# Altium PCB PowerSwitchBoard.PcbDoc
Units mm, origin at the board's own origin, x right, y up, seen from the top; angles counter-clockwise.
Board outline 79 x 95 mm, 2 copper layers (Top Layer, Bottom Layer); 59 components, 30 nets, 151 pads, 30 vias.
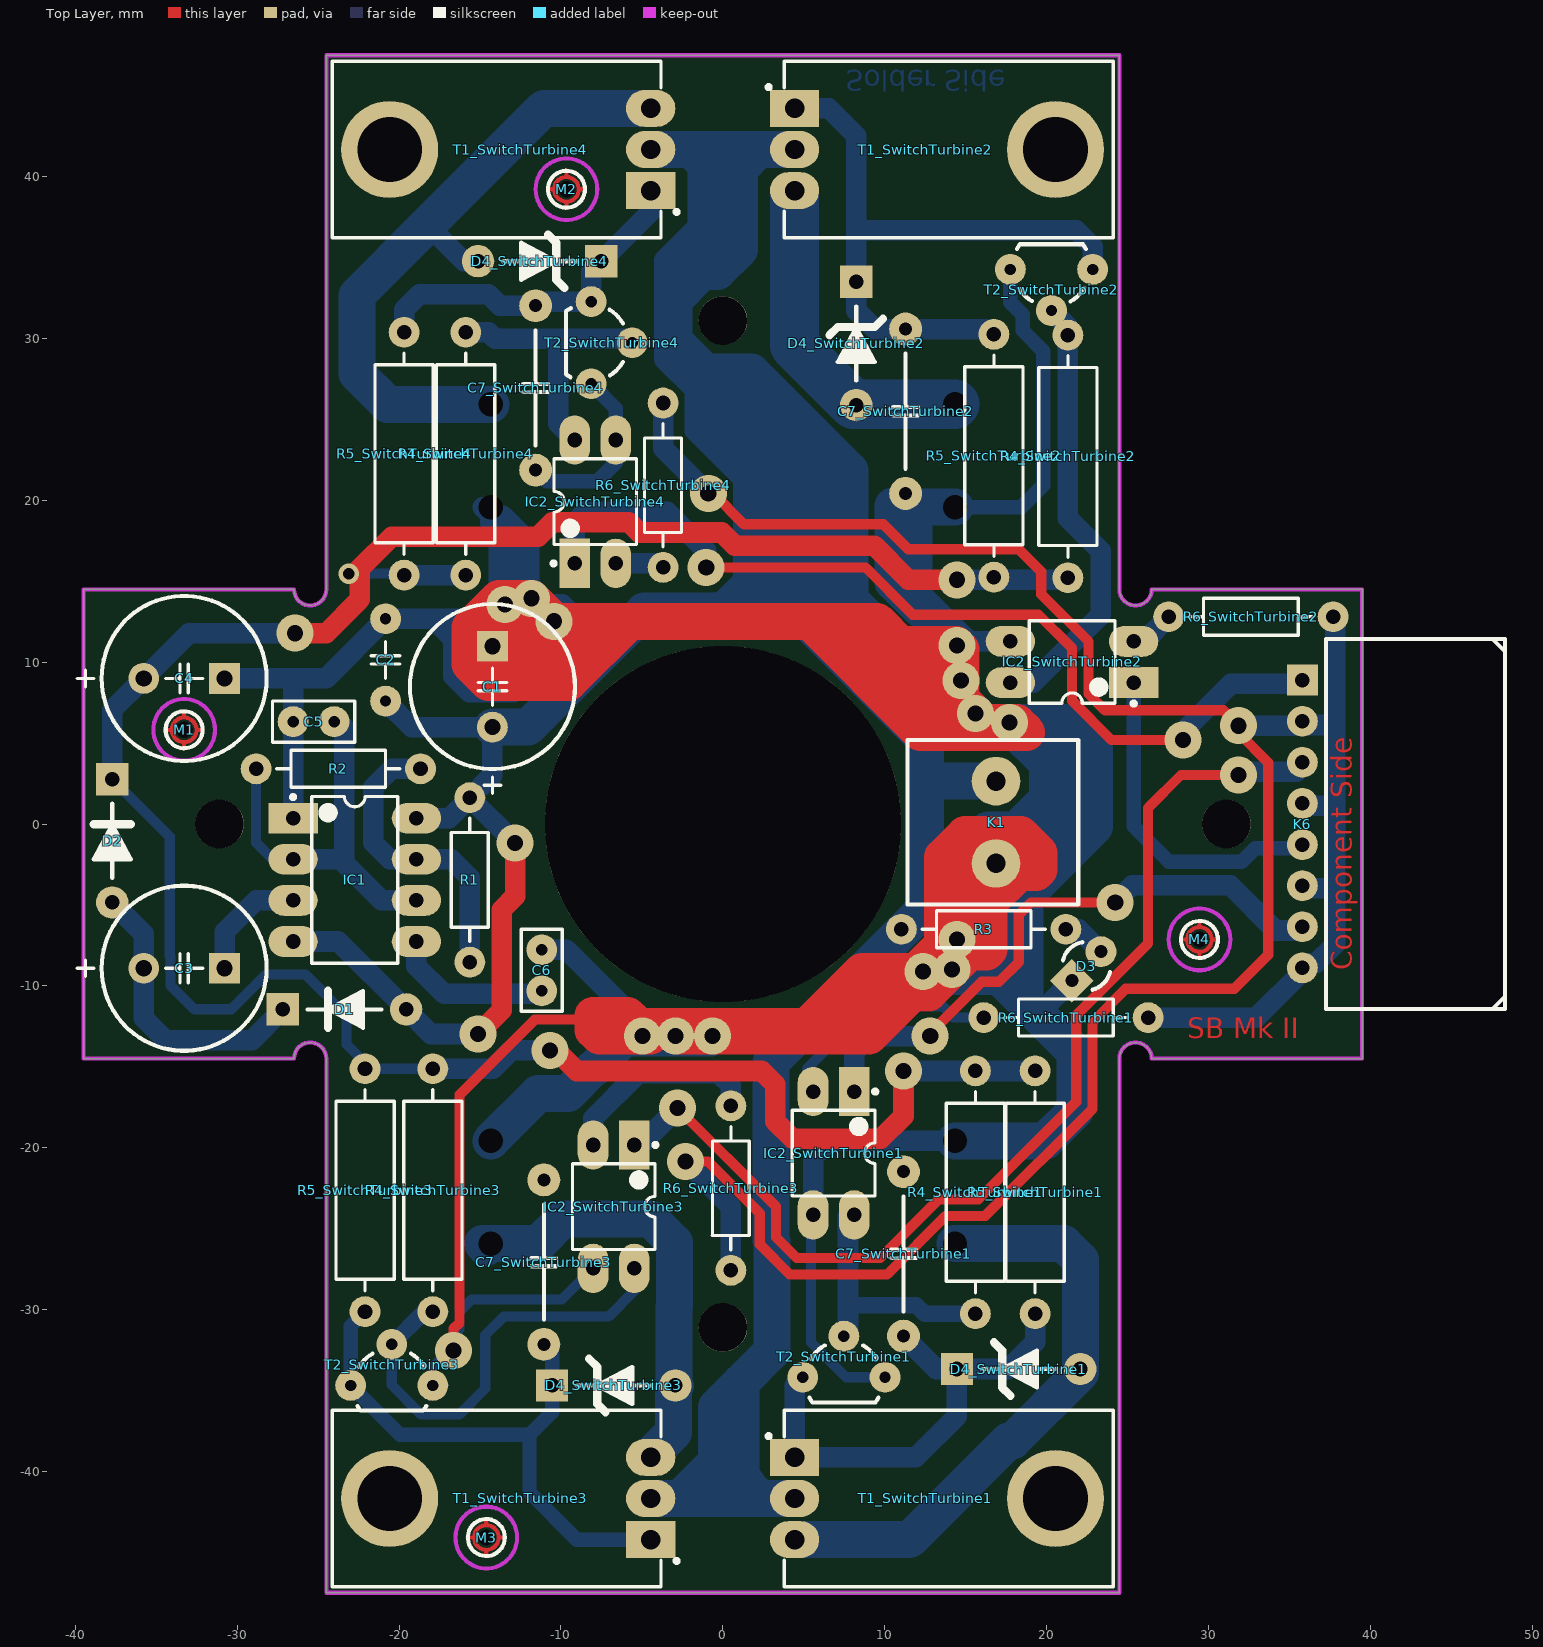
[diagram p0: Top Layer view]
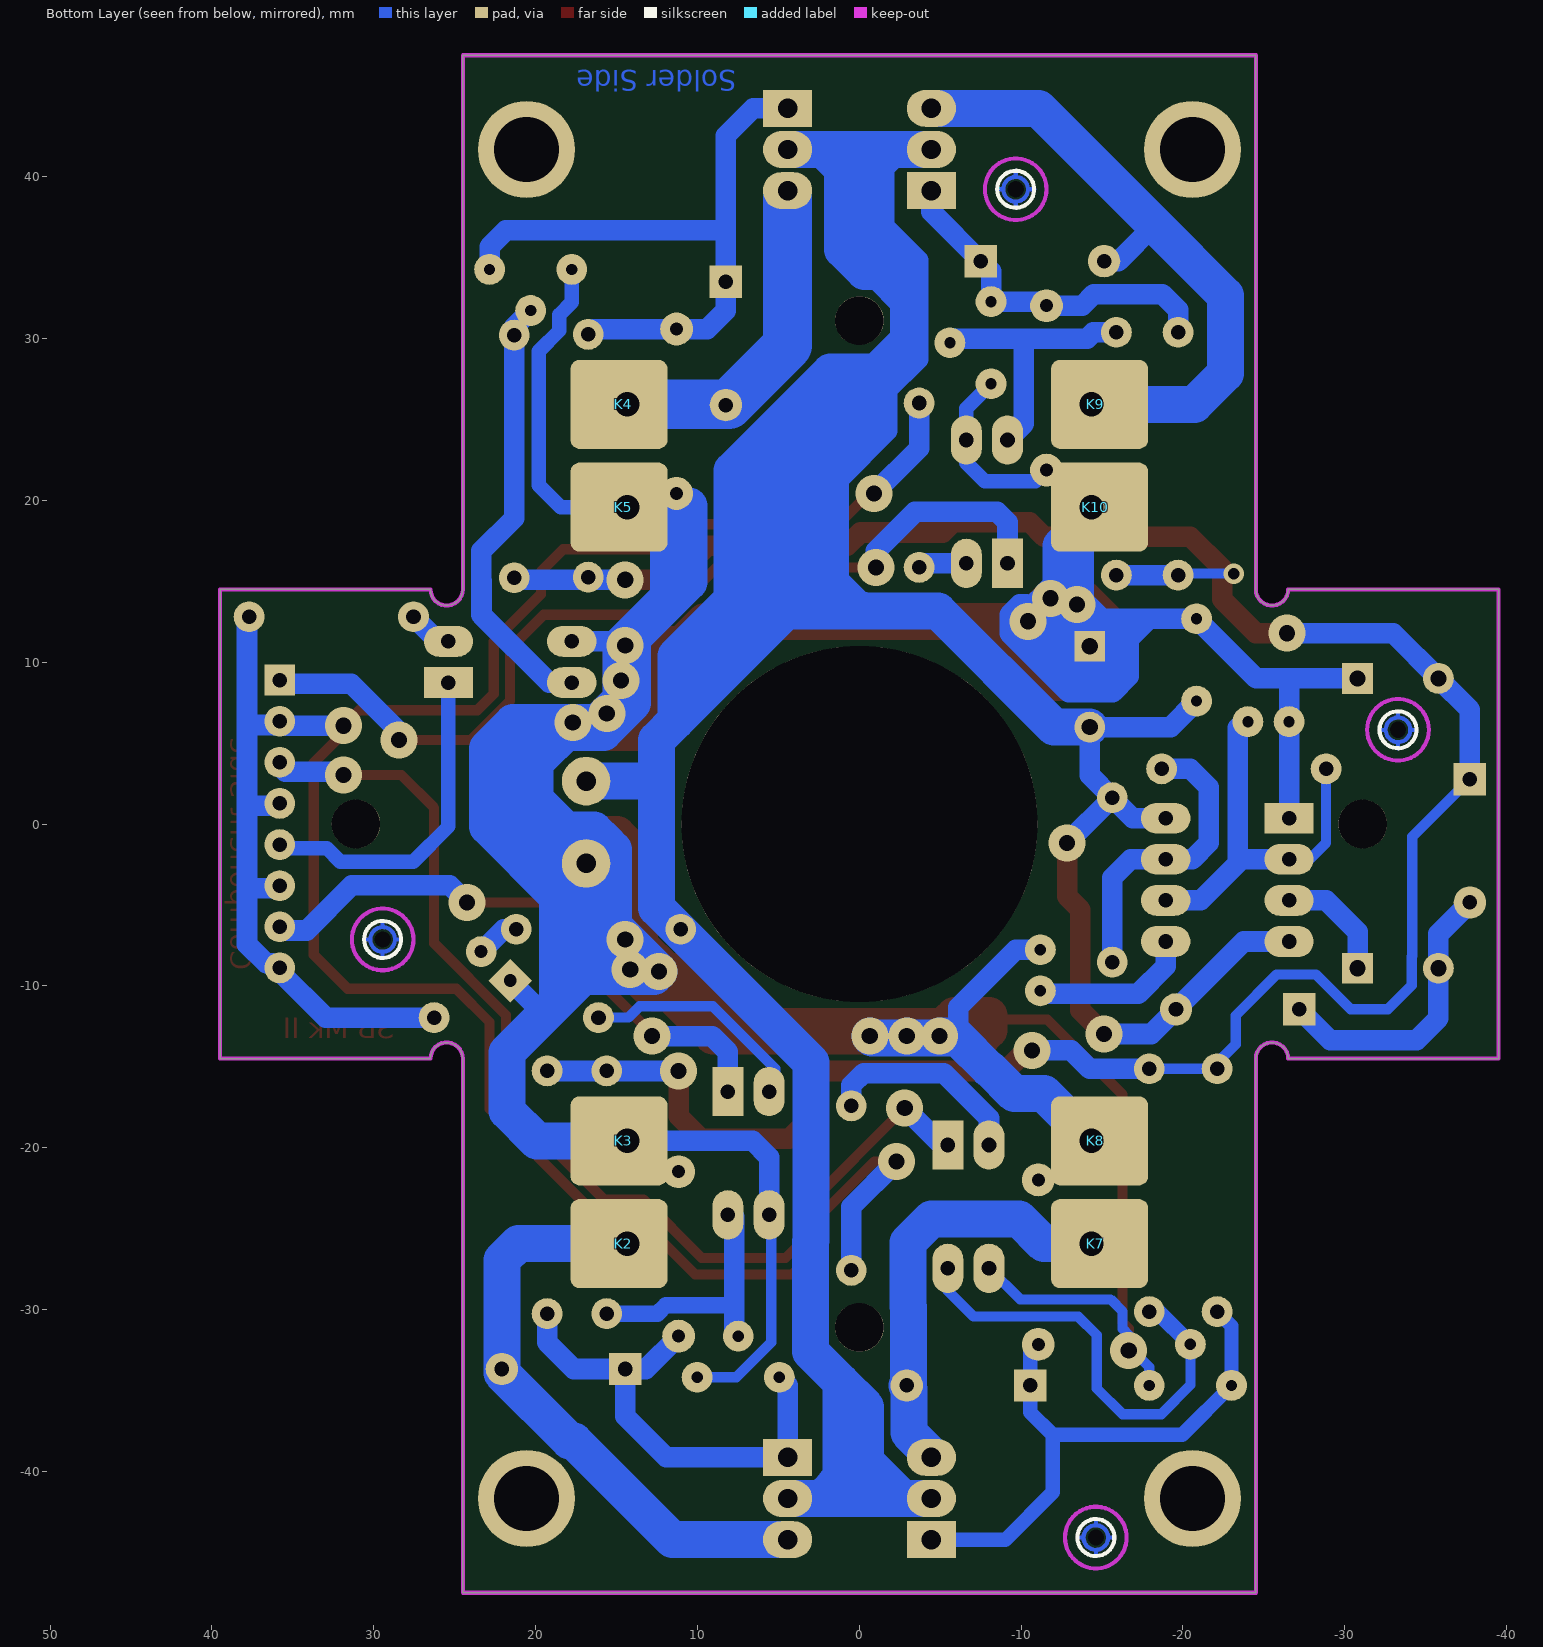
[diagram p1: Bottom Layer view, seen from below]
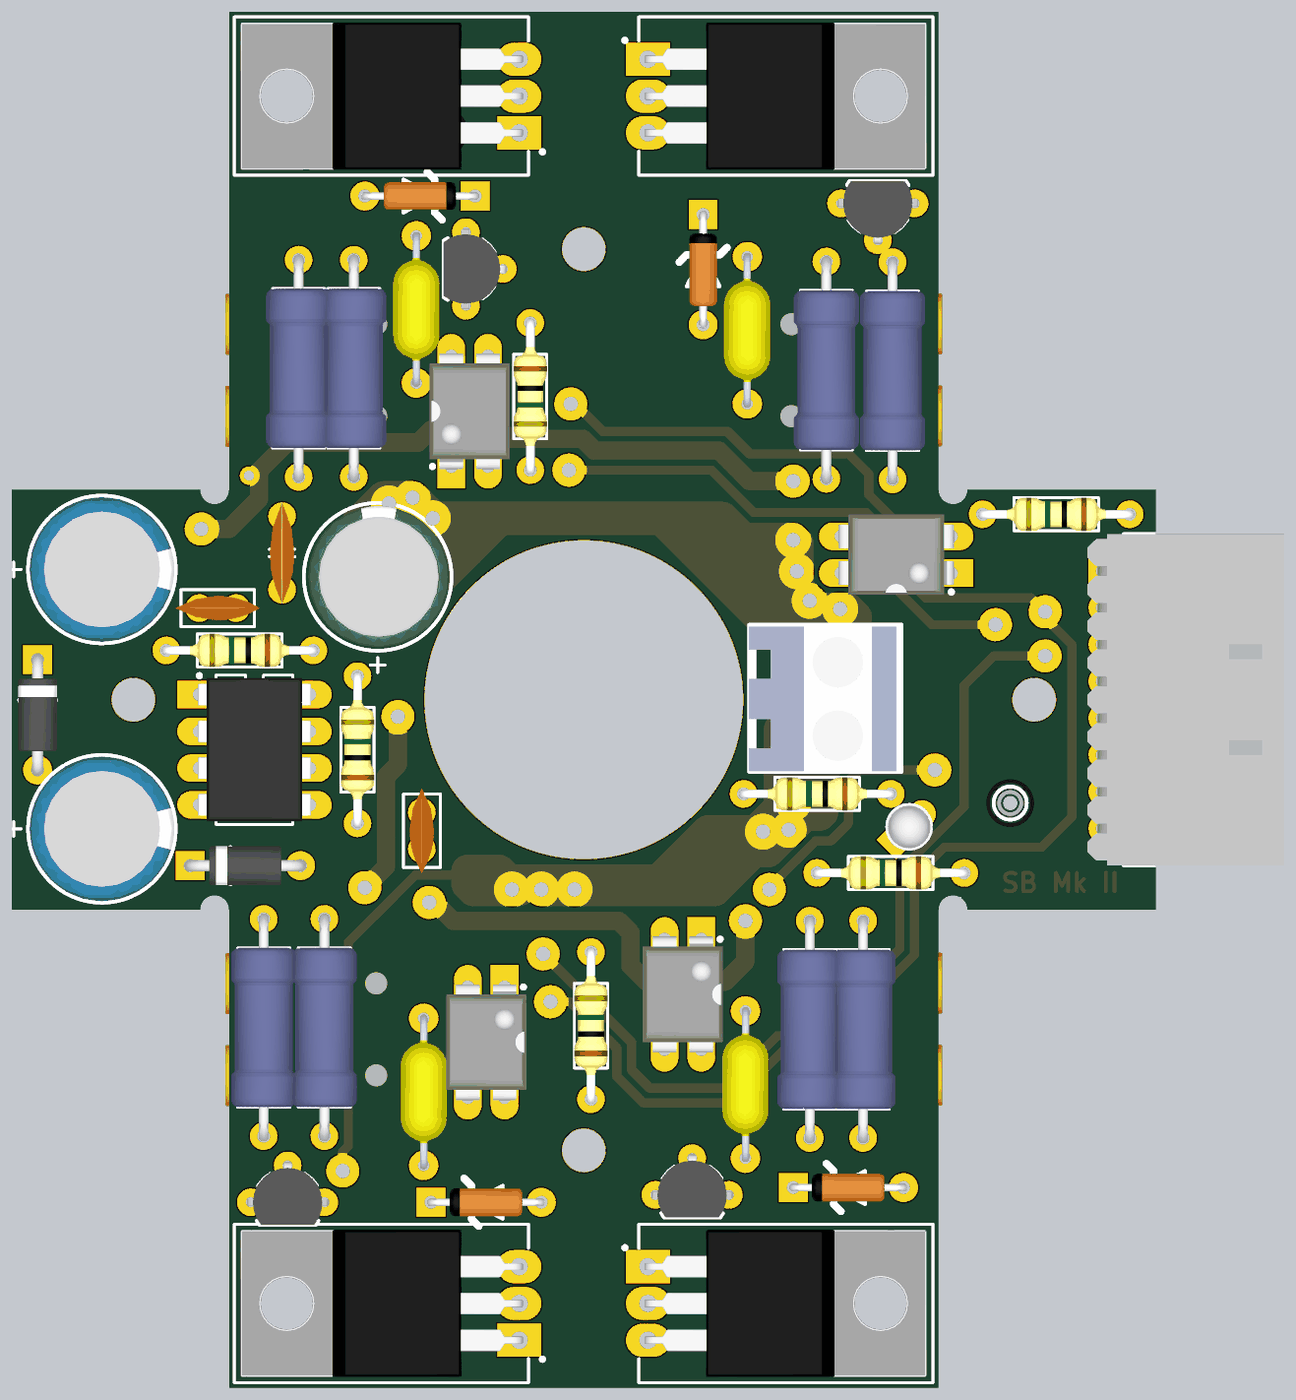
[diagram p2: 3D render of the assembled board from above, using the file's embedded part models]
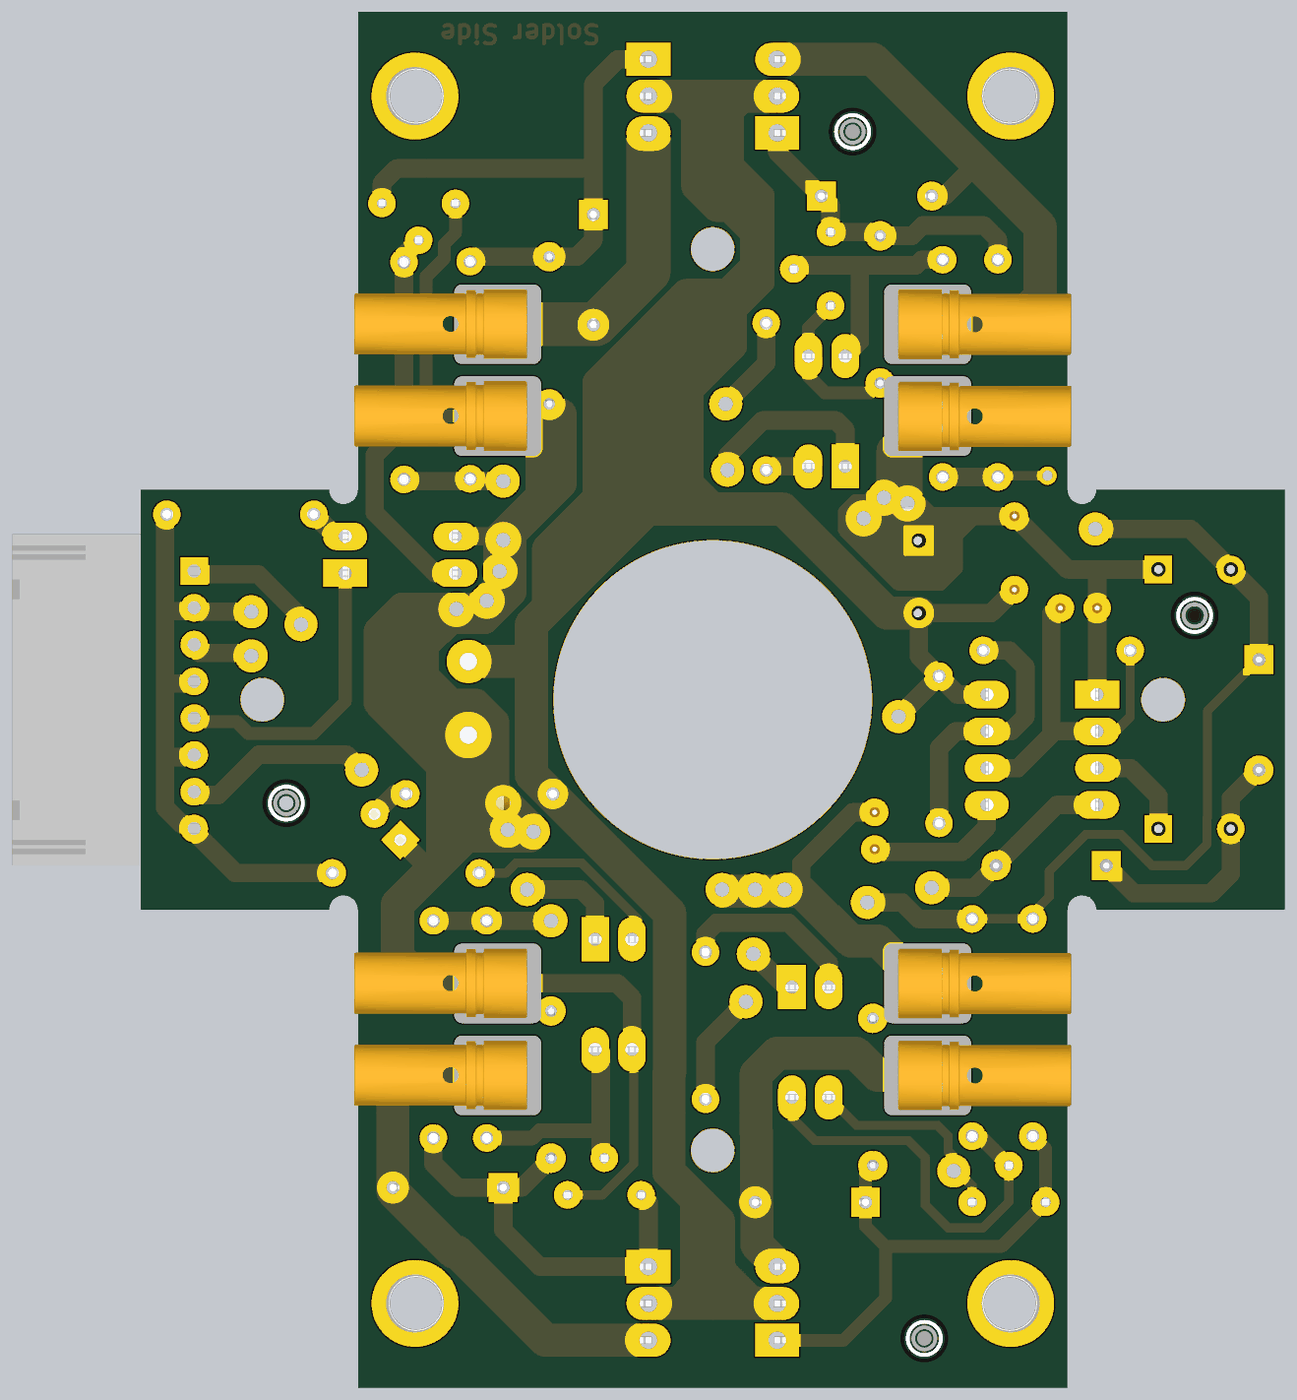
[diagram p3: 3D render of the assembled board from below, using the file's embedded part models]

## Layer stack, top to bottom
Top Solder: solder mask 0.0102, Solder Resist, Dk 3.5
Top Layer: signal copper 0.0356
Dielectric 1: dielectric 0.32, FR-4, Dk 4.8
Bottom Layer: signal copper 0.0356
Bottom Solder: solder mask 0.0102, Solder Resist, Dk 3.5

## Board outline
-24.5,14.5 -24.522,14.292 -24.586,14.093 -24.691,13.912 -24.831,13.757 -25,13.634 -25.191,13.549 -25.395,13.505 -25.605,13.505 -25.809,13.549 -26,13.634 -26.169,13.757 -26.309,13.912 -26.414,14.093 -26.478,14.292 -26.5,14.5 -39.5,14.5 -39.5,-14.5 -26.5,-14.5 -26.478,-14.292 -26.414,-14.093 -26.309,-13.912 -26.169,-13.757 -26,-13.634 -25.809,-13.549 -25.605,-13.505 -25.395,-13.505 -25.191,-13.549 -25,-13.634 -24.831,-13.757 -24.691,-13.912 -24.586,-14.093 -24.522,-14.292 -24.5,-14.5 -24.5,-47.5 24.5,-47.5 24.5,-14.5 24.522,-14.292 24.586,-14.093 24.691,-13.912 24.831,-13.757 25,-13.634 25.191,-13.549 25.395,-13.505 25.605,-13.505 25.809,-13.549 26,-13.634 26.169,-13.757 26.309,-13.912 26.414,-14.093 26.478,-14.292 26.5,-14.5 39.5,-14.5 39.5,14.5 26.5,14.5 26.478,14.292 26.414,14.093 26.309,13.912 26.169,13.757 26,13.634 25.809,13.549 25.605,13.505 25.395,13.505 25.191,13.549 25,13.634 24.831,13.757 24.691,13.912 24.586,14.093 24.522,14.292 24.5,14.5 24.5,47.5 -24.5,47.5

## Design rules (kind name [scope] priority, off if disabled: settings)
Clearance FETs [HasFootprint('TO-220H')] p1: gap=0.254
Clearance [All] p2: gap=0.381
PolygonConnect [All] p1: connectstyle=Relief reliefconductorwidth=0.254 reliefentries=4 polygonreliefangle="90 Angle" airgapwidth=0.254
RoutingVias [All] p1: holewidth=1 width=2.286 viastyle="Through Hole" minholewidth=1 minwidth=2.286 maxholewidth=1 maxwidth=2.286
SolderMaskExpansion [All] p1: expansion=0.102
Width [All] p1: maxlimit=3.81 minlimit=0.635 preferedwidth=0.889
29 further rules are at their usual default settings.

## Classes and differential pairs
channel class Switch: SwitchTurbine1 SwitchTurbine2 SwitchTurbine3 SwitchTurbine4
component class "Voltage doubler": C1 C2 C3 C4 C5 C6 D1 D2 IC1 R1 R2
component class SwitchTurbine4: C7_SwitchTurbine4 D4_SwitchTurbine4 IC2_SwitchTurbine4 R4_SwitchTurbine4 R5_SwitchTurbine4 R6_SwitchTurbine4 T1_SwitchTurbine4 T2_SwitchTurbine4
component class SwitchTurbine3: C7_SwitchTurbine3 D4_SwitchTurbine3 IC2_SwitchTurbine3 R4_SwitchTurbine3 R5_SwitchTurbine3 R6_SwitchTurbine3 T1_SwitchTurbine3 T2_SwitchTurbine3
component class SwitchTurbine2: C7_SwitchTurbine2 D4_SwitchTurbine2 IC2_SwitchTurbine2 R4_SwitchTurbine2 R5_SwitchTurbine2 R6_SwitchTurbine2 T1_SwitchTurbine2 T2_SwitchTurbine2
component class SwitchTurbine1: C7_SwitchTurbine1 D4_SwitchTurbine1 IC2_SwitchTurbine1 R4_SwitchTurbine1 R5_SwitchTurbine1 R6_SwitchTurbine1 T1_SwitchTurbine1 T2_SwitchTurbine1
component class PowerSwitchBoard: D3 K1 K2 K3 K4 K5 K6 K7 K8 K9 K10 M1 M2 M3 M4 R3

## Components (designator, comment, footprint, x,y, rotation, side; value= is the part's Value field where it differs from the comment)
C1 "470u" CAP-5-ELCO-10x12.5 -14.235,8.487 r90 top
C2 "100n" CAP-0.2-CERA -20.839,10.138 r270 top
C3 "330u" CAP-5-ELCO-10x16 -33.285,-8.912 r0 top
C4 "330u" CAP-5-ELCO-10x16 -33.285,8.995 r0 top
C5 "10n" CAP-0.1-CERA2 -25.284,6.328 r0 top
C6 "10n" CAP-0.1-CERA2 -11.187,-9.039 r270 top
C7_SwitchTurbine1 "220n" CAP-0.4-FILM 11.165,-26.565 r270 top (schematic designator C7)
C7_SwitchTurbine2 "220n" CAP-0.4-FILM 11.292,25.505 r90 top (schematic designator C7)
C7_SwitchTurbine3 "220n" CAP-0.4-FILM -11.06,-27.073 r270 top (schematic designator C7)
C7_SwitchTurbine4 "220n" CAP-0.4-FILM -11.568,26.946 r90 top (schematic designator C7)
D1 "1N4002" DIODE-0.3-SI -23.379,-11.452 r180 top
D2 "1N4002" DIODE-0.3-SI -37.73,-1.038 r90 top
D3 "Power" LED-3MM-GREEN 22.468,-8.785 r225 top
D4_SwitchTurbine1 "12V" DIODE-0.3-ZENER 18.277,-33.677 r180 top (schematic designator D4)
D4_SwitchTurbine2 "12V" DIODE-0.3-ZENER 8.244,29.696 r90 top (schematic designator D4)
D4_SwitchTurbine3 "12V" DIODE-0.3-ZENER -6.742,-34.693 r180 top (schematic designator D4)
D4_SwitchTurbine4 "12V" DIODE-0.3-ZENER -11.314,34.776 r0 top (schematic designator D4)
IC1 "LM555CN" IC-DIP-8 -22.744,-3.451 r0 top
IC2_SwitchTurbine1 "SFH617A" IC-DIP-4 6.847,-20.342 r270 top (schematic designator IC2)
IC2_SwitchTurbine2 "SFH617A" IC-DIP-4 21.579,10.011 r180 top (schematic designator IC2)
IC2_SwitchTurbine3 "SFH617A" IC-DIP-4 -6.742,-23.644 r270 top (schematic designator IC2)
IC2_SwitchTurbine4 "SFH617A" IC-DIP-4 -7.885,19.917 r90 top (schematic designator IC2)
K1 "Battery Input" CONN-SB-0.2-2WAY 16.88,0.105 r90 top
K2 "ESC1VCC" CONN-BULLET-3.5-HF 14.34,-25.93 r270 bottom locked
K3 "ESC1GND" CONN-BULLET-3.5-HF 14.34,-19.58 r270 bottom locked
K4 "ESC2VCC" CONN-BULLET-3.5-HF 14.34,25.93 r270 bottom locked
K5 "ESC2GND" CONN-BULLET-3.5-HF 14.34,19.58 r270 bottom locked
K6 "Enables" CONN-HDR-0.1-1x8-SOCKH 35.814,0 r90 top
K7 "ESC3VCC" CONN-BULLET-3.5-HF -14.34,-25.93 r90 bottom locked
K8 "ESC3GND" CONN-BULLET-3.5-HF -14.34,-19.58 r90 bottom locked
K9 "ESC4VCC" CONN-BULLET-3.5-HF -14.34,25.93 r90 bottom locked
K10 "ESC4GND" CONN-BULLET-3.5-HF -14.34,19.58 r90 bottom locked
M1 "Fiducial" MECH-FID-ALL -33.285,5.82 r90 top
M2 "Fiducial" MECH-FID-ALL -9.663,39.221 r90 top
M3 "Fiducial" MECH-FID-ALL -14.616,-44.091 r90 top
M4 "Fiducial" MECH-FID-ALL 29.453,-7.134 r90 top
R1 "15k" RES-0.4 -15.632,-3.451 r270 top
R2 "27k" RES-0.4 -23.76,3.407 r0 top
R3 "1k" RES-0.4 16.118,-6.499 r0 top
R4_SwitchTurbine1 "27k" RES-0.6 15.61,-22.755 r270 top (schematic designator R4)
R4_SwitchTurbine2 "27k" RES-0.6 21.325,22.711 r90 top (schematic designator R4)
R4_SwitchTurbine3 "27k" RES-0.6 -17.918,-22.628 r270 top (schematic designator R4)
R4_SwitchTurbine4 "27k" RES-0.6 -15.886,22.882 r90 top (schematic designator R4)
R5_SwitchTurbine1 "10k" RES-0.6 19.293,-22.755 r270 top (schematic designator R5)
R5_SwitchTurbine2 "10k" RES-0.6 16.753,22.755 r90 top (schematic designator R5)
R5_SwitchTurbine3 "10k" RES-0.6 -22.109,-22.628 r270 top (schematic designator R5)
R5_SwitchTurbine4 "10k" RES-0.6 -19.696,22.882 r90 top (schematic designator R5)
R6_SwitchTurbine1 "220R" RES-0.4 21.198,-11.96 r0 top (schematic designator R6)
R6_SwitchTurbine2 "220R" RES-0.4 32.628,12.805 r0 top (schematic designator R6)
R6_SwitchTurbine3 "220R" RES-0.4 0.497,-22.501 r270 top (schematic designator R6)
R6_SwitchTurbine4 "220R" RES-0.4 -3.694,20.933 r90 top (schematic designator R6)
T1_SwitchTurbine1 "IRF540" TO-220H 4.434,-41.678 r270 top (schematic designator T1)
T1_SwitchTurbine2 "IRF540" TO-220H 4.434,41.678 r270 top (schematic designator T1)
T1_SwitchTurbine3 "IRF540" TO-220H -4.456,-41.678 r90 top (schematic designator T1)
T1_SwitchTurbine4 "IRF540" TO-220H -4.456,41.678 r90 top (schematic designator T1)
T2_SwitchTurbine1 "BC547B" TO-92-T 7.482,-31.645 r0 top (schematic designator T2)
T2_SwitchTurbine2 "BC547B" TO-92-T 20.309,31.728 r180 top (schematic designator T2)
T2_SwitchTurbine3 "BC547B" TO-92-T -20.458,-32.153 r0 top (schematic designator T2)
T2_SwitchTurbine4 "BC547B" TO-92-T -5.599,29.74 r270 top (schematic designator T2)

## Footprints (in the part's own frame and the unit in brackets; to place one, negate y for a bottom-side part, rotate by r counter-clockwise, add the part's x,y. Pads: shape width x height; smd on the part's side, far side on the other; paste and mask are expansions set on the pad)
CAP-0.1-CERA2 [mm] "Capacitor, ceramic, 100 mil pitch"
  round 1.905 hole 0.7: 1(-1.27,0) 2(1.27,0)
  silkscreen extent -2.54,-1.27 2.54,1.27, body extent -2.92,-0.85 2.92,0.85, height 6.42
CAP-0.2-CERA [mm] "Capacitor, ceramic, 200 mil pitch"
  round 1.905 hole 0.7: 1(-2.54,0) 2(2.54,0)
  silkscreen extent -1.14,-0.89 1.14,0.89, body extent -3.49,-0.85 3.5,0.85, height 6.95
CAP-0.4-FILM [mil] "Capacitor, 2 leads, 400 mil pitch"
  round 80 hole 31.5: 1(-200,0) 2(200,0)
  silkscreen extent -140,-30 140,30, body extent -210,-63 210,63, height 166
CAP-5-ELCO-10x12.5 [mm] "Capacitor, Electrolytic, Radial, 10 mm body 5 mm leads"
  round 1.905 hole 1: 1(-2.5,0)
  rect 1.905x1.905 hole 1: 2(2.5,0)
  silkscreen extent -6.6,-5.1 5.1,5.1, body extent -4.88,-4.95 4.88,4.81, height 12.12
CAP-5-ELCO-10x16 [mm] "Capacitor, Electrolytic, Radial, 10 mm body 5 mm leads"
  round 1.905 hole 1: 1(-2.5,0)
  rect 1.905x1.905 hole 1: 2(2.5,0)
  silkscreen extent -6.6,-5.1 5.1,5.1, body extent -5,-5 5,5, height 16
CONN-BULLET-3.5-HF [mm] "Bullet plug, 3.5mm, female, right angle"
  rrect20% 5.5x6 smd: 1(0,-0.508)
  rrect50% 0x0 hole 1.5: 1(0,0)
  body extent -2.41,-10.42 2.37,1.53, height 4.79
CONN-HDR-0.1-1x8-SOCKH [mm] "Header, Socket, 8 way, 100 mil pitch, right angle"
  round 1.905 hole 0.9 unplated: 1(-8.89,0) 2(-6.35,0) 3(-3.81,0)
  round 1.905 hole 0.9: 4(-1.27,0) 5(1.27,0) 6(3.81,0) 7(6.35,0)
  rect 1.905x1.905 hole 0.9: 8(8.89,0)
  silkscreen extent -11.43,-12.51 11.43,-1.46, body extent -11.43,-12.57 11.43,1.02, height 6.98
CONN-SB-0.2-2WAY [mm] "Screw Terminal Block, 1 row 2 way, 5.08 mm pitch"
  round 3 hole 1.2: 1(-2.54,0) 2(2.54,0)
  silkscreen extent -5.08,-5.08 5.08,5.46, body extent -5.05,-5.04 4.95,5.46, height 14
DIODE-0.3-SI [mm] "Axial Silicon Diode, Leads 0.3 inch spacing"
  round 2 hole 0.9: 1(-3.81,0)
  rect 2x2 hole 0.9: 2(3.81,0)
  silkscreen extent -2.29,-1.14 2.29,1.14, body extent -4.2,-1.33 4.2,1.33, height 3.06
DIODE-0.3-ZENER [mm] "Axial Zener Diode, Leads 0.3 inch spacing"
  round 2 hole 0.9: 1(-3.81,0)
  rect 2x2 hole 0.9: 2(3.81,0)
  silkscreen extent -2.29,-1.65 2.29,1.65, body extent -4.07,-0.96 4.07,0.96, height 2.46
IC-DIP-4 [mm] "DIP; 4 Leads; Row Spacing 7.62 mm; Pitch 2.54 mm"
  rect 3.048x1.905 hole 0.9: 1(-3.81,1.27)
  oval 3.048x1.905 hole 0.9: 2(-3.81,-1.27) 3(3.81,-1.27) 4(3.81,1.27)
  silkscreen extent -3.93,-2.55 2.65,2.7, body extent -4,-2.77 4,2.77, height 4.31
IC-DIP-8 [mm] "DIP, 8-Leads, Row Spacing 7.62mm, Pitch 2.54mm, Body 9.78x6.48mm"
  rect 3.048x1.905 hole 0.9: 1(-3.81,3.81)
  oval 3.048x1.905 hole 0.9: 2(-3.81,1.27) 3(-3.81,-1.27) 4(-3.81,-3.81) 5(3.81,-3.81) 6(3.81,-1.27) 7(3.81,1.27) 8(3.81,3.81)
  silkscreen extent -3.93,-5.15 2.65,5.23, body extent -3.91,-4.95 3.91,4.96, height 4.57
LED-3MM-GREEN [mm] "LED, Green, 3 mm, 100 mil pitch"
  round 1.905 hole 0.8: 1(-1.27,0)
  rect 1.905x1.905 hole 0.8: 2(1.27,0)
  silkscreen extent -0.86,-1.5 0.77,1.5, body extent -1.66,-1.65 1.64,1.64, height 5.51
MECH-FID-ALL [mm]
  round 0 hole 1 unplated: 0(0,0)
  Top Layer circle w0.254: c0,0 r0.762
  Top Layer lines w0.254: 0,1.143 0,0.762 ; -1.143,0 -0.762,0 ; 0.762,0 1.143,0 ; 0,-0.762 0,-1.143
  Bottom Layer circle w0.254: c0,0 r0.762
  Bottom Layer lines w0.254: 0,1.143 0,0.762 ; -1.143,0 -0.762,0 ; 0.762,0 1.143,0 ; 0,-0.762 0,-1.143
  Keep-Out Layer circle w0.254: c0,0 r1.905
  silkscreen extent -1.14,-1.14 1.14,1.14
RES-0.4 [mm] "Axial Resistor Thru-Hole; 2 Leads; 0.4 in Pin Spacing"
  round 1.905 hole 0.9: 1(-5.08,0) 2(5.08,0)
  silkscreen extent -3.81,-1.14 3.81,1.14, body extent -5.38,-1.16 5.38,1.16, height 2.93
RES-0.6 [mm] "Axial Resistor Thru-Hole; 2 Leads; 0.6 in Pin Spacing"
  round 1.905 hole 0.9: 1(-7.5,0) 2(7.5,0)
  silkscreen extent -6.22,-1.8 6.22,1.8, body extent -7.85,-2.25 7.85,2.25, height 4.75
TO-92-T [mm] "TO-92 package"
  round 1.905 hole 0.7: 1(-2.54,-2.54) 2(0,0) 3(2.54,-2.54)
  silkscreen extent -2.13,-4.1 2.13,-0.57, body extent -2.79,-4.09 2.79,0.25, height 8
TO-220H [mil] "TO-220AB, 3 leads, 100 mil pitch, horizontal"
  rect 90x120 hole 47.24: 1(-100,0)
  oval 90x120 hole 47.24: 2(0,0) 3(100,0)
  round 236.22 hole 157.48 unplated: 4(0,635)
  silkscreen extent -215,-68 215,775, body extent -200,-10 200,757, height 165

## Part data
C1 C3 C4: library part "Cap Pol3", "Polarized Capacitor (Surface Mount)"
C2 C5 C6 C7_SwitchTurbine1 C7_SwitchTurbine2 C7_SwitchTurbine3 C7_SwitchTurbine4: library part Cap, "Capacitor"
D1 D2: library part "Diode 1N4002", "1 Amp General Purpose Rectifier"
D3: library part LED0, "Typical 3mm green LED"
D4_SwitchTurbine1 D4_SwitchTurbine2 D4_SwitchTurbine3 D4_SwitchTurbine4: library part "Diode Zener", "Zener Diode"
IC1: "Timer"
IC2_SwitchTurbine1 IC2_SwitchTurbine2 IC2_SwitchTurbine3 IC2_SwitchTurbine4: library part Optoisolator1, "4-Pin Phototransistor Optocoupler"
K1: library part "Header 2", "Header, 2-Pin"
K2 K3 K4 K5 K7 K8 K9 K10: library part Plug, "Plug"
K6: library part "Header 8H", "Header, 8-Pin, Right Angle"
M1 M2 M3 M4: "Fiducial marking"
R1 R2 R3 R4_SwitchTurbine1 R4_SwitchTurbine2 R4_SwitchTurbine3 R4_SwitchTurbine4 R5_SwitchTurbine1 R5_SwitchTurbine2 R5_SwitchTurbine3 R5_SwitchTurbine4 R6_SwitchTurbine1 R6_SwitchTurbine2 R6_SwitchTurbine3 R6_SwitchTurbine4: library part Res1, "Resistor"
T1_SwitchTurbine1 T1_SwitchTurbine2 T1_SwitchTurbine3 T1_SwitchTurbine4: "HEXFET N-Channel Power MOSFET"
T2_SwitchTurbine1 T2_SwitchTurbine2 T2_SwitchTurbine3 T2_SwitchTurbine4: "Amplifier Transistor NPN Silicon"

## Free pads (board coordinates)
  round 3 hole 3: 1(-31.11,0) 1(0,-31.11) 1(0,31.11) 1(31.11,0)
  round 22 hole 22: 1(0,0)

## Via types
v1: diameter 2.286, hole 1, Top Layer to Bottom Layer, 29 vias
v2: diameter 1.27, hole 0.711, Top Layer to Bottom Layer, 1 vias

## Nets (pads, with @x,y where several pads share a name; then routed paths per layer and width w, separated by ;. In a path a pad name is that pad's centre, name@x,y a point inside that pad or via, vN(x,y) a via of type N, cw(c..) or ccw(c..) an arc to the next point about the centre after c; other vN are vias at no path point)
BATT: C1.1 C2.2 D1.1 IC1.4 IC1.8 K1.2 R1.1 R3.1 T1_SwitchTurbine1.2 T1_SwitchTurbine2.2 T1_SwitchTurbine3.2 T1_SwitchTurbine4.2 | length 282.3
  Top Layer w1.27: v1(-15.124,-12.976) -13.664,-11.516 -13.664,-5.293 -12.838,-4.467 v1(-12.838,-1.165)
  Bottom Layer w1.27: IC1.4 -23.76,-7.261 D1.1 -18.045,-12.976 v1(-15.124,-12.976) ; C2.2 -19.228,5.987 C1.1 -14.235,3.026 R1.1 ; IC1.8 -16.902,0.359 R1.1 ; v1(-12.838,-1.165) R1.1 ; -3.024,32.363 -3.024,34.303 -1.535,35.792 -1.535,36.935 ; -2.678,41.678 -1.535,40.535 -1.535,36.935 ; -1.535,38.459 -1.535,36.935 ; -0.9,13.167 -0.373,13.694 -0.133,13.694 1.259,15.086 1.259,21.319 -1.726,24.304 -1.726,26.828 -3.631,28.733 -3.631,34.839 -1.535,36.935
  Bottom Layer w2.286: C1.1 -12.036,5.987 -4.857,13.167 -0.9,13.167 2.533,13.167 ; T1_SwitchTurbine3.2 -2.678,-41.678 ; T1_SwitchTurbine4.2 -2.678,41.678 0.116,41.678 ; -3.024,31.093 -3.024,29.857 ; -0.9,27.918 -1.085,27.918 ; -0.392,-38.122 -0.392,-39.392 ; T1_SwitchTurbine1.2 2.021,-41.678 ; T1_SwitchTurbine2.2 2.148,41.678 ; 12.651,2.645 K1.2 ; -3.024,29.857 -1.085,27.918 ; -3.024,29.857 -3.024,28.943 -1.999,27.918 ; -3.024,29.857 -3.024,32.363 -1.253,34.134 ; -2.678,-41.678 -0.392,-39.392 ; -2.678,-41.678 -0.392,-41.678 ; -1.999,27.918 3.539,22.38 3.539,14.173 2.533,13.167 ; -1.999,27.918 -1.085,27.918 ; -1.253,34.134 -0.328,34.134 1.04,35.503 ; -1.253,34.134 0.116,35.503 ; -1.085,27.918 1.774,27.918 7.863,21.829 7.863,13.859 11.338,10.384 11.338,6.374 ; -0.392,-41.678 2.021,-41.678 ; -0.392,-41.678 -0.392,-39.392 ; -0.392,-39.392 -0.392,-36.017 1.132,-34.493 ; 0.116,35.503 0.116,41.678 ; 0.116,35.503 1.04,35.503 ; 0.116,41.678 2.148,41.678 ; 1.04,35.503 1.04,40.48 2.148,41.587 2.148,41.678 ; 1.132,-34.493 1.132,-40.408 1.513,-40.789 1.513,-40.86 2.021,-41.368 2.021,-41.678 ; 1.132,-34.493 3.024,-32.601 3.024,-25.8 2.973,-25.749 2.973,-14.738 12.524,-5.188 12.524,5.188 11.338,6.374 ; 2.533,13.167 4.545,13.167 11.338,6.374
BOOST: C3.1 D1.2 D2.1 | length 17.9
  Bottom Layer w1.27: D2.1 -35.785,-6.793 C3.1 -35.785,-12 -34.428,-13.357 -29.094,-13.357 D1.2
CVOLT: C6.2 IC1.5 | length 10.1
  Bottom Layer w1.27: IC1.5 -18.934,-8.785 -17.22,-10.5 -11.378,-10.5 C6.2
DIS: IC1.7 R1.2 R2.2 | length 18.9
  Bottom Layer w1.27: R2.2 -20.458,3.407 -21.601,2.264 -21.601,-1.165 -20.585,-2.181 IC1.7 -16.775,-2.181 -15.632,-3.324 R1.2
GATE_SwitchTurbine1: C7_SwitchTurbine1.2 D4_SwitchTurbine1.2 R5_SwitchTurbine1.2 T1_SwitchTurbine1.1 T2_SwitchTurbine1.1 | length 30.6
  Bottom Layer w1.27: T2_SwitchTurbine1.1 4.434,-34.693 T1_SwitchTurbine1.1 11.927,-39.138 14.467,-36.598 D4_SwitchTurbine1.2 ; C7_SwitchTurbine1.2 13.197,-33.677 D4_SwitchTurbine1.2 ; R5_SwitchTurbine1.2 19.293,-32.026 17.642,-33.677 D4_SwitchTurbine1.2
GATE_SwitchTurbine2: C7_SwitchTurbine2.2 D4_SwitchTurbine2.2 R5_SwitchTurbine2.2 T1_SwitchTurbine2.1 T2_SwitchTurbine2.1 | length 40.8
  Bottom Layer w1.27: T1_SwitchTurbine2.1 6.549,44.218 8.244,42.523 8.244,36.681 ; R5_SwitchTurbine2.2 16.423,30.585 C7_SwitchTurbine2.2 9.387,30.585 8.244,31.728 D4_SwitchTurbine2.2 8.244,36.681 ; T2_SwitchTurbine2.1 22.849,35.665 21.833,36.681 8.244,36.681
GATE_SwitchTurbine3: C7_SwitchTurbine3.2 D4_SwitchTurbine3.2 R5_SwitchTurbine3.2 T1_SwitchTurbine3.1 T2_SwitchTurbine3.1 | length 36.6
  Bottom Layer w0.889: R5_SwitchTurbine3.2 -22.998,-31.017 T2_SwitchTurbine3.1 -19.95,-37.741 -11.949,-37.741 ; D4_SwitchTurbine3.2@-11.06,-34.185 D4_SwitchTurbine3.2 ; C7_SwitchTurbine3.2 -10.552,-32.661 D4_SwitchTurbine3.2 ; T1_SwitchTurbine3.1 -9.028,-44.218 -11.949,-41.297 -11.949,-37.741 ; -11.949,-37.741 -10.552,-36.344 D4_SwitchTurbine3.2
GATE_SwitchTurbine4: C7_SwitchTurbine4.2 D4_SwitchTurbine4.2 R5_SwitchTurbine4.2 T1_SwitchTurbine4.1 T2_SwitchTurbine4.1 | length 22.1
  Bottom Layer w1.27: R5_SwitchTurbine4.2 -19.696,31.772 -18.724,32.744 -14.489,32.744 -13.771,32.026 C7_SwitchTurbine4.2 -11.314,32.28 T2_SwitchTurbine4.1 -8.139,34.141 D4_SwitchTurbine4.2 -4.456,37.824 T1_SwitchTurbine4.1
GND: K6.1 K6.3 K6.5 K6.7 R6_SwitchTurbine1.2 R6_SwitchTurbine2.2 R6_SwitchTurbine3.2 R6_SwitchTurbine4.2 | length 166.2
  Top Layer w0.635: v1(-2.297,-20.85) -0.94,-20.85 2.275,-24.065 2.275,-25.97 4.14,-27.835 10.149,-27.835 13.768,-24.216 16.221,-24.216 22.849,-17.588 22.849,-12.235 24.902,-10.182 31.612,-10.182 33.707,-8.087 33.707,3.789 31.866,5.63 v1(31.866,6.074) 30.913,7.026 23.611,7.026 22.595,8.042 22.595,11.281 19.674,14.202 19.674,15.599 18.298,16.975 11.465,16.975 9.92,18.52 1.303,18.52 -0.602,20.425 v1(-0.9,20.425)
  Bottom Layer w0.635: K6.5@35.803,1.038 36.057,1.038 K6.5@36.14,1.121
  Bottom Layer w1.27: R6_SwitchTurbine4.2 -3.694,23.219 v1(-0.9,20.425) ; v1(-2.297,-20.85) 0.497,-23.644 R6_SwitchTurbine3.2 ; R6_SwitchTurbine1.2 32.965,-11.96 35.803,-9.122 36.311,-8.614 36.645,-8.614 37.835,-7.424 37.835,-3.959 ; v1(31.866,6.074) 35.759,6.074 35.803,6.118 37.791,6.118 37.835,6.074 ; K6.3@35.803,-4.042 35.886,-3.959 37.835,-3.959 ; K6.5@36.14,1.121 37.835,1.121 ; R6_SwitchTurbine2.2 37.835,12.678 37.835,6.074 ; 37.835,-3.959 37.835,1.121 ; 37.835,1.121 37.835,6.074
INV_SwitchTurbine1: IC2_SwitchTurbine1.4 R4_SwitchTurbine1.2 T2_SwitchTurbine1.2 | length 15.6
  Bottom Layer w1.016: 7.736,-29.74 11.954,-29.74 12.469,-30.255 R4_SwitchTurbine1.2
  Bottom Layer w1.27: T2_SwitchTurbine1.2 7.736,-31.391 7.736,-29.74 IC2_SwitchTurbine1.4@7.736,-24.279
INV_SwitchTurbine2: IC2_SwitchTurbine2.4 R4_SwitchTurbine2.2 T2_SwitchTurbine2.2 | length 27.4
  Bottom Layer w1.27: IC2_SwitchTurbine2.4 19.166,8.741 23.344,12.919 23.344,15.034 23.357,15.046 23.357,16.869 21.325,18.901 R4_SwitchTurbine2.2 21.325,30.712 T2_SwitchTurbine2.2
INV_SwitchTurbine3: IC2_SwitchTurbine3.4 R4_SwitchTurbine3.2 T2_SwitchTurbine3.2 | length 28.1
  Bottom Layer w0.635: T2_SwitchTurbine3.2 -20.458,-34.667 -18.654,-36.471 -16.267,-36.471 -14.676,-34.88 -14.676,-31.578 -13.537,-30.439 -7.06,-30.439 -5.472,-28.851 IC2_SwitchTurbine3.4
  Bottom Layer w1.016: T2_SwitchTurbine3.2 -18.433,-30.128 R4_SwitchTurbine3.2
INV_SwitchTurbine4: IC2_SwitchTurbine4.4 R4_SwitchTurbine4.2 T2_SwitchTurbine4.2 | length 17.3
  Bottom Layer w1.27: R4_SwitchTurbine4.2 -14.462,30.382 -14.074,29.994 -10.298,29.994 ; IC2_SwitchTurbine4.4 -10.171,24.743 -10.171,29.867 -10.298,29.994 ; T2_SwitchTurbine4.2 -5.853,29.994 -10.298,29.994
MGND: C1.2 C2.1 C4.2 C5.1 C6.1 C7_SwitchTurbine1.1 C7_SwitchTurbine2.1 C7_SwitchTurbine3.1 C7_SwitchTurbine4.1 D3.2 IC1.1 IC2_SwitchTurbine1.3 IC2_SwitchTurbine2.3 IC2_SwitchTurbine3.3 IC2_SwitchTurbine4.3 K1.1 K3.1 K5.1 K8.1 K10.1 T2_SwitchTurbine1.3 T2_SwitchTurbine2.3 T2_SwitchTurbine3.3 T2_SwitchTurbine4.3 | length 492.6
  Top Layer w0.635: v1(-16.648,-32.534) -16.648,-31.193 -16.267,-30.812 -16.267,-16.723 -11.631,-12.087 -8.012,-12.087 -5.625,-12.087 -5.472,-12.087 -5.035,-12.524 -4.456,-13.103 v1(-2.932,-13.103)
  Top Layer w2.286: v1(-13.46,13.553) -15.632,11.381 ; v1(-10.425,12.524) v1@-10.398,12.524 ; v1@-4.456,-13.103 v1(-4.964,-13.103) -7.631,-13.103 -8.012,-12.722 -8.012,-12.087 -8.012,-11.833 -5.879,-11.833 -5.625,-12.087 -5.188,-12.524 -5.035,-12.524 5.188,-12.524 8.604,-9.107 v1@11.932,-9.107 ; v1(-2.932,-13.103) v1(-0.646,-13.103) 8.498,-13.103 ; v1(14.467,-7.134) v1@12.619,-8.982 ; -15.632,11.381 -15.632,12.134 -13.818,13.948 v1(-11.822,13.948) v1@-10.398,12.524 ; -15.632,11.381 -15.632,9.884 -14.489,8.741 -9.536,8.741 -5.753,12.524 ; v1@-10.398,12.524 -5.753,12.524 ; -5.753,12.524 5.35,12.524 ; 5.35,12.524 9.54,12.524 10.974,11.09 12.562,11.09 ; 5.35,12.524 12.205,5.669 18.771,5.669 18.175,6.264 v1(17.705,6.264) 16.172,6.264 v1(15.605,6.831) 14.721,7.715 ; 8.498,-13.103 9.044,-13.103 11.711,-10.436 12.703,-10.436 v1(14.156,-8.982) ; 8.498,-13.103 11.165,-10.436 ; 11.165,-10.436 11.165,-9.874 v1@11.932,-9.107 ; 11.165,-10.436 v1@12.494,-9.107 ; v1@11.932,-9.107 13.578,-7.461 13.578,-2.054 14.975,-0.657 18.404,-0.657 19.547,-1.8 19.547,-2.816 19.356,-3.007 18.276,-3.007 16.435,-4.847 16.435,-7.768 16.3,-7.904 15.235,-7.904 v1(14.156,-8.982) ; v1@11.932,-9.107 v1(12.376,-9.107) v1@12.494,-9.107 ; v1@12.494,-9.107 v1@12.619,-8.982 ; 12.562,11.09 14.403,11.09 v1(14.467,11.027) 14.721,10.773 v1(14.721,8.868) 14.721,7.715 ; 12.562,11.09 12.562,9.874 14.721,7.715 ; v1@12.619,-8.982 v1(14.156,-8.982)
  Bottom Layer w0.635: T2_SwitchTurbine3.3 -17.918,-33.55 -16.902,-32.534 v1(-16.648,-32.534) -16.648,-31.574 -16.267,-31.193 -16.267,-30.121 -15.525,-29.379 -9.937,-29.379 IC2_SwitchTurbine3.3 ; K10.1@-14.594,19.326 K10.1@-14.34,19.58 ; IC2_SwitchTurbine1.3@5.45,-24.279 5.45,-32.026 7.609,-34.185 T2_SwitchTurbine1.3
  Bottom Layer w0.889: C7_SwitchTurbine4.1 -10.889,21.187 -7.758,21.187 -6.615,22.33 IC2_SwitchTurbine4.3 -6.615,25.676 T2_SwitchTurbine4.3 ; K5.1@14.34,19.58 14.848,19.58 18.448,19.58 19.801,20.933 19.801,29.221 18.531,30.491 18.531,31.474 17.769,32.236 T2_SwitchTurbine2.3
  Bottom Layer w1.27: C4.2 -26.681,8.995 ; IC1.1 C5.1 -26.554,8.868 -26.681,8.995 ; K10.1@-14.848,19.58 -14.594,19.326 -13.854,18.586 -13.854,13.821 -14.997,12.678 ; C1.2 -14.235,12.678 -14.997,12.678 ; v1@-13.937,13.076 v1(-13.46,13.553) v1@-12.457,14.556 ; C6.1 -9.663,-7.769 -6.107,-11.325 -6.107,-13.23 ; v1@-10.298,13.567 -9.917,13.567 -9.282,12.932 -9.282,11.794 -12.93,8.146 -15.672,8.146 -16.648,9.122 -16.648,11.408 -17.918,12.678 ; IC2_SwitchTurbine1.3 5.577,-20.596 6.593,-19.58 K3.1@14.34,-19.58 ; v1(14.467,11.027) 14.613,11.173 14.721,11.281 IC2_SwitchTurbine2.3 ; 19.991,-11.643 19.991,-11.262 D3.2 ; -26.681,8.995 -24.522,8.995 C2.1 -17.918,12.678 ; -17.918,12.678 -14.997,12.678
  Bottom Layer w2.286: K8.1@-14.34,-19.58 -11.419,-16.659 -9.574,-16.659 -8.05,-15.135 -8.012,-15.135 -6.107,-13.23 ; K10.1@-13.854,18.586 -12.457,17.189 v1@-12.457,14.556 ; v1(-11.822,13.948) -12.43,14.556 v1@-12.457,14.556 ; v1(-10.425,12.524) v1@-12.457,14.556 ; v1(-4.964,-13.103) -5.98,-13.103 -6.107,-13.23 ; v1(-2.932,-13.103) v1@-3.059,-13.23 ; v1(-0.646,-13.103) -0.773,-13.23 v1@-3.059,-13.23 ; v1(14.156,-8.982) 15.299,-8.982 15.483,-9.166 ; K3.1@14.34,-19.58 14.848,-19.58 19.928,-19.58 21.769,-17.739 21.769,-14.109 17.08,-9.42 12.689,-9.42 v1@12.435,-9.166 ; K5.1@14.34,19.58 C7_SwitchTurbine2.1@11.8,19.58 ; v1(14.467,-7.134) 15.356,-6.245 ; v1(14.467,11.027) v1@14.005,11.489 ; -6.107,-13.23 v1@-3.059,-13.23 ; 10.53,19.497 10.613,19.58 ; 10.53,19.497 10.53,19.663 10.613,19.58 ; 10.53,19.497 10.53,14.964 v1@14.005,11.489 ; 10.613,19.58 C7_SwitchTurbine2.1@11.8,19.58 ; C7_SwitchTurbine2.1@11.8,19.58 11.8,13.986 14.613,11.173 14.721,11.065 v1(14.721,8.868) 14.721,7.715 v1(15.605,6.831) v1@16.172,6.264 ; v1@12.435,-9.166 v1(12.376,-9.107) 15.191,-6.292 15.191,-1.584 15.673,-1.102 ; v1@12.435,-9.166 15.483,-9.166 ; v1@14.005,11.489 14.005,7.479 v1@15.219,6.264 ; v1@15.219,6.264 15.814,5.669 18.133,5.669 18.871,4.931 18.912,4.931 ; v1@15.219,6.264 v1@16.172,6.264 ; 15.483,-9.166 17.515,-9.166 18.658,-10.309 18.658,-4.467 22.976,-0.149 22.976,4.677 21.388,6.264 v1(17.705,6.264) v1@17.578,6.264 ; 15.483,-9.166 15.483,-3.832 K1.1 18.213,-1.102 ; 15.673,-1.102 16.396,-0.379 18.133,-0.379 20.055,1.543 ; 15.673,-1.102 18.213,-1.102 ; v1@16.172,6.264 v1@17.578,6.264 ; v1@17.578,6.264 18.912,4.931 ; 18.213,-1.102 20.055,0.74 20.055,1.543 ; 18.912,4.931 20.055,3.788 20.055,1.543
NetD3_1: D3.1 R3.2 | length 2.7
  Bottom Layer w1.27: R3.2 21.978,-6.499 D3.1
NetIC2_SwitchTurbine1_2: IC2_SwitchTurbine1.2 R6_SwitchTurbine1.1 | length 14.3
  Bottom Layer w0.635: IC2_SwitchTurbine1.2@5.196,-16.659 5.196,-15.12 9.054,-11.262 13.579,-11.262 14.277,-11.96 R6_SwitchTurbine1.1
NetIC2_SwitchTurbine2_2: IC2_SwitchTurbine2.2 R6_SwitchTurbine2.1 | length 2.8
  Bottom Layer w1.27: IC2_SwitchTurbine2.2 26.024,11.281 R6_SwitchTurbine2.1
NetIC2_SwitchTurbine3_2: IC2_SwitchTurbine3.2 R6_SwitchTurbine3.1 | length 12.9
  Bottom Layer w1.27: IC2_SwitchTurbine3.2 -8.012,-18.188 -5.213,-15.389 -0.265,-15.389 0.497,-16.151 R6_SwitchTurbine3.1
NetIC2_SwitchTurbine4_2: IC2_SwitchTurbine4.2 R6_SwitchTurbine4.1 | length 2.6
  Bottom Layer w1.27: IC2_SwitchTurbine4.2 R6_SwitchTurbine4.1@-4.031,16.107
OUT: C3.2 IC1.3 | length 7.3
  Bottom Layer w1.27: C3.2 -30.785,-6.666 -28.84,-4.721 IC1.3
T1EN: IC2_SwitchTurbine1.1 K6.2 | length 37.4
  Top Layer w0.635: v1(12.816,-13.103) 12.816,-12.927 15.998,-9.745 17.063,-9.745 18.277,-8.531 18.277,-5.61 19.039,-4.848 v1(24.246,-4.848)
  Bottom Layer w0.635: K6.2@35.759,-6.626 K6.2@35.803,-6.582
  Bottom Layer w1.27: IC2_SwitchTurbine1.1 8.117,-14.085 9.099,-13.103 v1(12.816,-13.103) ; v1(24.246,-4.848) 25.308,-3.786 31.356,-3.786 34.152,-6.582 K6.2@35.803,-6.582
T1POWER: D4_SwitchTurbine1.1 K2.1 T1_SwitchTurbine1.3 | length 37.1
  Bottom Layer w2.286: T1_SwitchTurbine1.3 11.546,-44.218 17.642,-38.122 17.901,-38.122 22.087,-33.936 D4_SwitchTurbine1.1 22.087,-26.946 21.071,-25.93 14.848,-25.93 K2.1@14.34,-25.93
T2EN: IC2_SwitchTurbine2.1 K6.4 | length 20.5
  Bottom Layer w0.889: IC2_SwitchTurbine2.1 25.389,-0.149 27.565,-2.325 32.073,-2.325 32.897,-1.502 K6.4@35.803,-1.502
T2POWER: D4_SwitchTurbine2.1 K4.1 T1_SwitchTurbine2.3 | length 20.5
  Bottom Layer w3.048: T1_SwitchTurbine2.3@4.434,38.63 4.434,29.569 8.073,25.93 K4.1@14.34,25.93
T3EN: IC2_SwitchTurbine3.1 K6.6 | length 67.8
  Top Layer w0.635: v1(-2.805,-17.548) 3.291,-23.644 3.291,-25.549 4.561,-26.819 9.728,-26.819 13.348,-23.2 15.8,-23.2 21.833,-17.167 21.833,-11.814 26.278,-7.369 26.278,0.994 28.31,3.026 v1(31.866,3.026)
  Bottom Layer w1.27: IC2_SwitchTurbine3.1 -5.091,-19.834 v1(-2.805,-17.548) ; v1(31.866,3.026) 31.91,3.07 32.078,3.238 35.463,3.238 K6.6@35.803,3.578
T3POWER: D4_SwitchTurbine3.1 K7.1 T1_SwitchTurbine3.3 | length 27
  Bottom Layer w2.286: K7.1@-14.621,-26.157 -14.848,-25.93 -14.34,-25.93 -11.405,-25.93 -9.881,-24.406 -4.446,-24.406 -2.996,-25.857 -2.996,-29.829 -3.024,-29.857 -3.024,-34.601 D4_SwitchTurbine3.1 ; T1_SwitchTurbine3.3@-4.456,-39.011 -3.059,-37.614 -3.059,-34.912 D4_SwitchTurbine3.1@-3.024,-34.877
T4EN: IC2_SwitchTurbine4.1 K6.8 | length 57.8
  Top Layer w0.635: v1(-1.027,15.853) 8.815,15.853 11.736,12.932 19.507,12.932 21.579,10.86 21.579,7.622 24.016,5.185 v1(28.437,5.185)
  Bottom Layer w1.27: IC2_SwitchTurbine4.1 -9.155,18.647 -8.52,19.282 -3.44,19.282 -1.027,16.869 v1(-1.027,15.853) ; v1(28.437,5.185) 28.437,5.698 31.397,8.658 K6.8@35.803,8.658
T4POWER: D4_SwitchTurbine4.1 K9.1 T1_SwitchTurbine4.3 | length 40.9
  Bottom Layer w1.27: -18.258,37.02 -16.013,34.776 D4_SwitchTurbine4.1
  Bottom Layer w2.286: K9.1@-14.34,25.93 -14.848,25.93 -20.712,25.93 -22.617,27.835 -22.617,32.661 -18.258,37.02 -11.06,44.218 T1_SwitchTurbine4.3
TRIG: C5.2 IC1.2 IC1.6 R2.1 | length 24.9
  Bottom Layer w0.635: R2.1 -28.84,-1.165 -27.824,-2.181 IC1.2
  Bottom Layer w1.27: IC1.2 -23.633,-2.181 -23.379,-2.435 ; C5.2@-23.76,6.328 -23.379,5.947 -23.379,-2.435 ; IC1.6 -21.093,-4.721 -23.379,-2.435
VBOOST: C4.1 D2.2 R4_SwitchTurbine1.1 R4_SwitchTurbine2.1 R4_SwitchTurbine3.1 R4_SwitchTurbine4.1 R5_SwitchTurbine1.1 R5_SwitchTurbine2.1 R5_SwitchTurbine3.1 R5_SwitchTurbine4.1 | length 158.2
  Top Layer w1.27: v1(-26.427,11.789) -24.512,11.789 -22.427,13.874 -22.427,15.789 -20.458,17.758 -11.417,17.758 -10.528,18.647 -5.8,18.647 -5.165,18.012 -0.075,18.012 0.751,17.186 9.368,17.186 11.463,15.091 v1(14.467,15.091) ; v1(-10.679,-13.992) -10.552,-13.865 -10.425,-13.865 -9.028,-15.262 2.402,-15.262 3.227,-16.088 3.227,-18.363 4.317,-19.453 9.768,-19.453 11.165,-18.056 v1(11.165,-15.262)
  Bottom Layer w0.635: D2.2 -34.174,-0.784 -34.174,-8.148 -34.134,-8.188 -34.134,-9.968 -32.65,-11.452 -30.364,-11.452 -28.205,-9.293 -25.792,-9.293 -23.252,-11.833 -23.252,-13.604 -21.728,-15.128 R4_SwitchTurbine3.1 ; v2(-23.125,15.472) -19.786,15.472 R5_SwitchTurbine4.1
  Bottom Layer w1.27: D2.2 -37.73,7.05 C4.1 -32.991,11.789 v1(-26.427,11.789) ; R5_SwitchTurbine4.1 R4_SwitchTurbine4.1 ; R4_SwitchTurbine3.1 -17.911,-15.135 -14.23,-15.135 -13.087,-13.992 v1(-10.679,-13.992) ; v1(11.165,-15.262) 19.286,-15.262 R5_SwitchTurbine1.1 ; v1(14.467,15.091) 21.205,15.091 R4_SwitchTurbine2.1
pads on no net: M1.0 M2.0 M3.0 M4.0 T1_SwitchTurbine1.4 T1_SwitchTurbine2.4 T1_SwitchTurbine3.4 T1_SwitchTurbine4.4

## Keep-outs
Keep-Out Layer:
  the board outline again, w0.254

## Other copper
Top Layer:
  region net MGND: 5.45,12.678 9.386,12.678 15.736,6.328 15.126,6.328 14.467,5.669 14.316,5.82 12.308,5.82
  region net MGND: -7.123,12.424 -10.933,12.424 -12.203,13.694 -12.838,13.059 -14.235,13.059 -14.235,12.424 -15.505,11.154 -15.505,8.995 -14.87,8.36 -10.933,8.36
  region net MGND: 5.45,-12.595 5.831,-12.595 9.641,-8.785 11.8,-8.785 11.8,-8.658 14.276,-6.182 14.276,-1.356 17.578,-1.356 18.277,-0.657 19.166,-1.546 19.166,-3.197 19.293,-3.324 18.087,-4.53 16.753,-4.53 16.753,-7.642 14.34,-10.055 11.292,-10.055 8.625,-12.722
  text "Component Side" at 38.851,-9.039 h1.27 r90
  text "SB Mk II" at 28.691,-13.23 h1.27
Bottom Layer:
  region net BATT: -1.154,28.172 -0.78,27.798 1.894,27.798 8.117,21.575 8.117,13.605 11.338,10.384 11.038,10.085 11.038,7.217 10.149,7.217 3.926,13.44 -0.011,13.44 -0.011,14.075 1.259,15.345 1.005,15.599 1.005,21.573 -1.535,24.113
  region net MGND: -12.457,15.599 -10.298,13.44 -10.298,11.281 -10.171,11.154 -13.346,7.979 -15.505,7.979 -16.775,9.249 -16.902,9.249 -16.902,11.154 -16.648,11.408 -17.283,12.043 -17.283,12.424 -14.997,12.424 -14.743,12.678
  region net MGND: 16.626,6.582 17.007,6.201 21.706,6.201 21.706,5.058 22.849,3.915 22.468,3.534 22.468,-0.911 22.341,-0.911 18.086,-5.166 18.086,-9.738 16.308,-9.738 15.356,-8.785 15.356,-3.324 19.801,1.121 19.801,3.026
  text "Solder Side" at 7.609,46.587 h1.27 r180

## Silkscreen, mask and mechanical layers (free items; w line width, h text height)
Mechanical 1:
  lines w0.254: -42.269,-8.912 -30.785,-8.912 ; -35.814,0 -31.11,0 -8.89,0 ; -35.785,8.995 -30.785,8.995 ; -33.274,-8.912 -33.274,10.287 ; -14.235,-1.132 -14.235,10.987 ; 0,0 26.035,0 ; 7.979,14.5 27.94,14.5 ; 16.88,-2.435 16.88,2.645